# EAGLE board STM32F767VG (EAGLE 9.2.0)
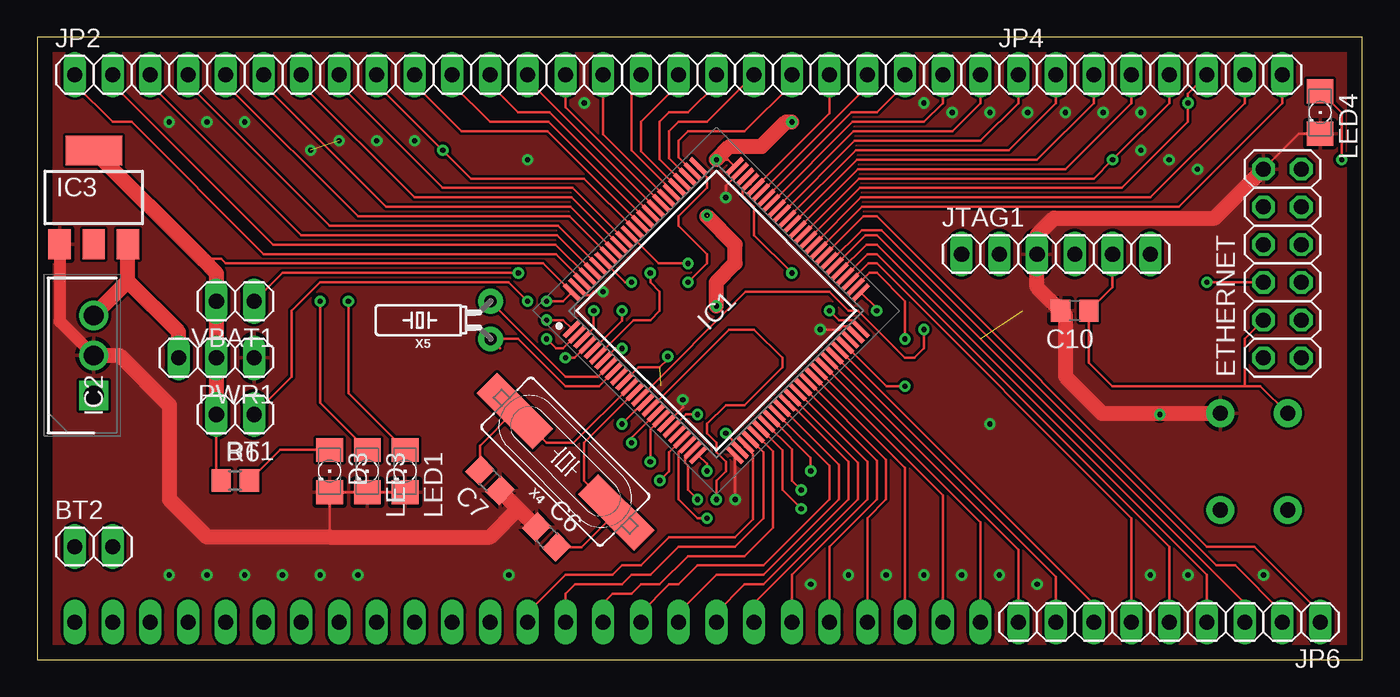
[diagram p0: board, top side]
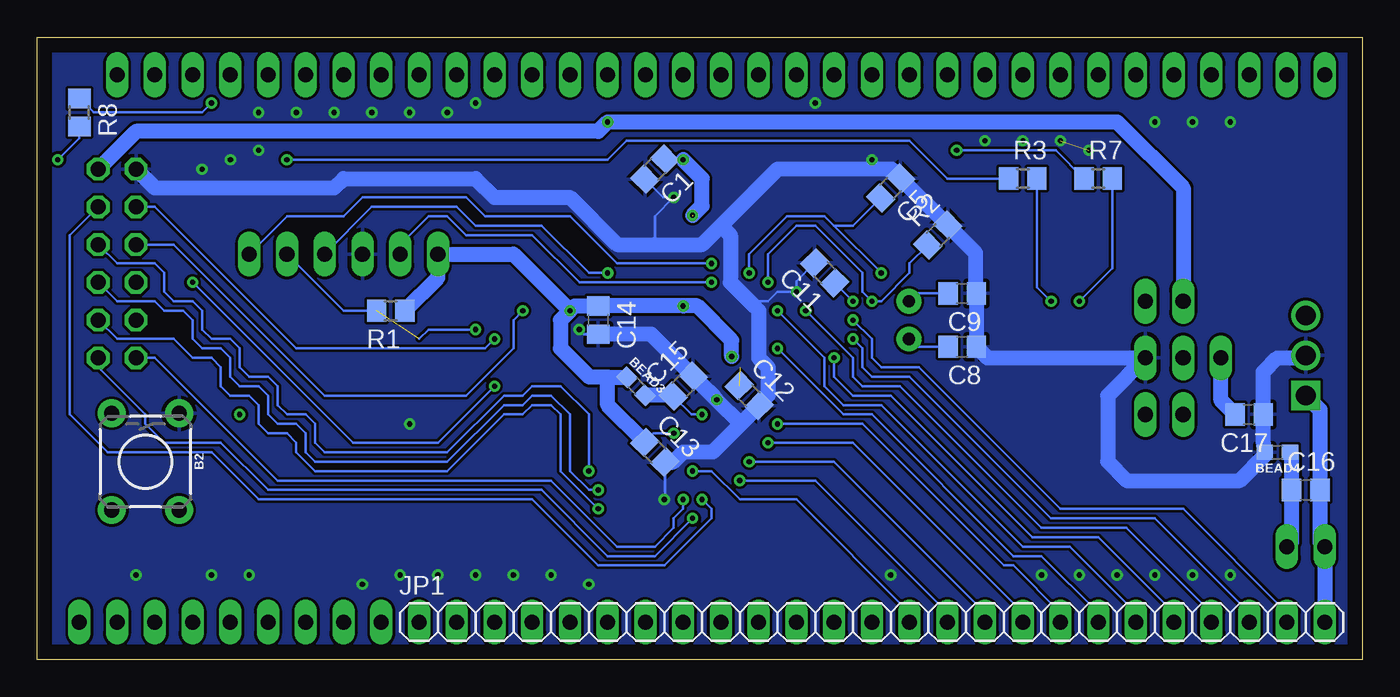
[diagram p1: board, bottom side, seen from below]

Size 89.2 x 41.9 mm. Coordinates in mm from the lower left corner, seen from the top.
Outline: 0,0 89.2,0 89.2,41.9 0,41.9 0,0
Copper layers (1*16): Top 0.035mm / dielectric 1.5mm / Bottom 0.035mm
Design rules "default": minimum track width 6mil, minimum drill 0.35mm, track to track 6mil, track to pad 6mil, pad to pad 6mil, via to via 6mil, smd to smd 6mil, copper to edge 40mil, drill to drill 6mil, minimum pad ring 10mil, minimum via ring 8mil, stop-mask expansion 4mil, vias tented up to drill 0mil, thermal gap 10mil
Net classes: 0 default: width 0.178 mm, drill 0.178 mm, clearance 0.178 mm

## Footprints (pad centres in the part's own frame; a part is rotated, then mirrored left to right if it is on the bottom)
TACTILE_SWITCH_PTH_6.0MM = drill 1.016 pad 1.88: 1 -3.251,2.261; 2 3.251,2.261; 3 -3.251,-2.261; 4 3.251,-2.261
0603 = smd 1.1 x 1: 1 -0.85,0; 2 0.85,0
1X02 = drill 1.016 long: 1 -1.27,0; 2 1.27,0
C0805 = smd 1.3 x 1.5: 1 -0.95,0; 2 0.95,0
LED_1206 = smd 1.6 x 1.803: A -1.422,0; C 1.422,0
2X06 = drill 1.016 octagon: 1 -6.35,-1.27; 2 -6.35,1.27; 3 -3.81,-1.27; 4 -3.81,1.27; 5 -1.27,-1.27; 6 -1.27,1.27; 7 1.27,-1.27; 8 1.27,1.27; 9 3.81,-1.27; 10 3.81,1.27; 11 6.35,-1.27; 12 6.35,1.27
QFP50P1600X1600X160-100N = smd 1.475 x 0.3: 1 -7.738,6; 2 -7.738,5.5; 3 -7.738,5; 4 -7.738,4.5; 5 -7.738,4; 6 -7.738,3.5; 7 -7.738,3; 8 -7.738,2.5; 9 -7.738,2; 10 -7.738,1.5; 11 -7.738,1; 12 -7.738,0.5; 13 -7.738,0; 14 -7.738,-0.5; 15 -7.738,-1; 16 -7.738,-1.5; 17 -7.738,-2; 18 -7.738,-2.5; 19 -7.738,-3; 20 -7.738,-3.5; 21 -7.738,-4; 22 -7.738,-4.5; 23 -7.738,-5; 24 -7.738,-5.5; 25 -7.738,-6; 51 7.738,-6; 52 7.738,-5.5; 53 7.738,-5; 54 7.738,-4.5; 55 7.738,-4; 56 7.738,-3.5; 57 7.738,-3; 58 7.738,-2.5; 59 7.738,-2; 60 7.738,-1.5; 61 7.738,-1; 62 7.738,-0.5; 63 7.738,0; 64 7.738,0.5; 65 7.738,1; 66 7.738,1.5; 67 7.738,2; 68 7.738,2.5; 69 7.738,3; 70 7.738,3.5; 71 7.738,4; 72 7.738,4.5; 73 7.738,5; 74 7.738,5.5; 75 7.738,6 | smd 0.3 x 1.475: 26 -6,-7.738; 27 -5.5,-7.738; 28 -5,-7.738; 29 -4.5,-7.738; 30 -4,-7.738; 31 -3.5,-7.738; 32 -3,-7.738; 33 -2.5,-7.738; 34 -2,-7.738; 35 -1.5,-7.738; 36 -1,-7.738; 37 -0.5,-7.738; 38 0,-7.738; 39 0.5,-7.738; 40 1,-7.738; 41 1.5,-7.738; 42 2,-7.738; 43 2.5,-7.738; 44 3,-7.738; 45 3.5,-7.738; 46 4,-7.738; 47 4.5,-7.738; 48 5,-7.738; 49 5.5,-7.738; 50 6,-7.738; 76 6,7.738; 77 5.5,7.738; 78 5,7.738; 79 4.5,7.738; 80 4,7.738; 81 3.5,7.738; 82 3,7.738; 83 2.5,7.738; 84 2,7.738; 85 1.5,7.738; 86 1,7.738; 87 0.5,7.738; 88 0,7.738; 89 -0.5,7.738; 90 -1,7.738; 91 -1.5,7.738; 92 -2,7.738; 93 -2.5,7.738; 94 -3,7.738; 95 -3.5,7.738; 96 -4,7.738; 97 -4.5,7.738; 98 -5,7.738; 99 -5.5,7.738; 100 -6,7.738
TO270P460X1020X2008-3P = drill 1.32 pad 1.98 square: 1 0,0 | drill 1.32 pad 1.98: 2 2.7,0; 3 5.4,0
SOT223 = smd 1.5 x 2: 1 -2.3,-3.15; 2 0,-3.15; 3 2.3,-3.15 | smd 3.8 x 2: 4 0,3.15
1X25 = drill 1.016 long: 1 -29.21,0; 2 -26.67,0; 3 -24.13,0; 4 -21.59,0; 5 -19.05,0; 6 -16.51,0; 7 -13.97,0; 8 -11.43,0; 9 -8.89,0; 10 -6.35,0; 11 -3.81,0; 12 -1.27,0; 13 1.27,0; 14 3.81,0; 15 6.35,0; 16 8.89,0; 17 11.43,0; 18 13.97,0; 19 16.51,0; 20 19.05,0; 21 21.59,0; 22 24.13,0; 23 26.67,0; 24 29.21,0; 25 31.75,0
1X08 = drill 1.016 long: 1 -8.89,0; 2 -6.35,0; 3 -3.81,0; 4 -1.27,0; 5 1.27,0; 6 3.81,0; 7 6.35,0; 8 8.89,0
1X09 = drill 1.016 long: 1 -10.16,0; 2 -7.62,0; 3 -5.08,0; 4 -2.54,0; 5 0,0; 6 2.54,0; 7 5.08,0; 8 7.62,0; 9 10.16,0
1X06 = drill 1.016 long: 1 -6.35,0; 2 -3.81,0; 3 -1.27,0; 4 1.27,0; 5 3.81,0; 6 6.35,0
1X03 = drill 1.016 long: 1 -2.54,0; 2 0,0; 3 2.54,0
R0805 = smd 1.3 x 1.5: 1 -0.95,0; 2 0.95,0
HC49UP = smd 5.334 x 1.93: 1 -4.826,0; 2 4.826,0
CRYSTAL-PTH-2X6-CYL = drill 0.813 pad 1.676: 1 -1.27,0; 2 1.27,0

## Placement (x,y rotation side)
B2  6MM(momentary)  [TACTILE_SWITCH_PTH_6.0MM]  81.92,13.33 270 bottom
BEAD3  30Ω/1.8A  [0603]  48.9,18.41 315 bottom
BEAD4  30Ω/1.8A  [0603]  5.71,13.97 180 bottom
BT1  [1X02]  13.34,16.51 180 top
BT2  [1X02]  3.81,7.62 0 top
C1  100nF  [C0805]  47.62,33.02 225 bottom
C5  1uF  [C0805]  31.75,31.75 225 bottom
C6  20pF  [C0805]  34.29,8.25 315 top
C7  20pF  [C0805]  30.48,12.06 135 top
C8  4.3pF  [C0805]  26.93,21.06 180 bottom
C9  4.3pF  [C0805]  26.93,24.66 180 bottom
C10  100nF  [C0805]  69.85,23.5 180 top
C11  100nF  [C0805]  36.2,26.04 135 bottom
C12  100nF  [C0805]  41.27,17.78 315 bottom
C13  100nF  [C0805]  47.62,13.97 315 bottom
C14  100nF  [C0805]  51.44,22.86 270 bottom
C15  100nF  [C0805]  45.72,18.41 45 bottom
C16  1uF  [C0805]  3.81,11.43 0 bottom
C17  100nF  [C0805]  7.62,16.51 180 bottom
D3  [LED_1206]  19.68,12.7 270 top
ETHERNET  [2X06]  83.82,26.67 90 top
IC1  STM32F767VGT6  [QFP50P1600X1600X160-100N]  45.72,23.5 45 top
IC2  L7805CV  [TO270P460X1020X2008-3P]  3.81,17.78 90 top
IC3  LD117AS33TR  [SOT223]  3.81,31.11 0 top
JP1  [1X25]  34.29,2.54 0 bottom
JP2  [1X25]  31.75,39.37 0 top
JP4  [1X08]  74.93,39.37 0 top
JP6  [1X09]  76.2,2.54 180 top
JTAG1  [1X06]  68.58,27.3 0 top
LED1  [LED_1206]  24.77,12.7 270 top
LED3  [LED_1206]  22.23,12.7 270 top
LED4  [LED_1206]  86.36,36.83 270 top
PWR1  [1X03]  12.06,20.32 180 top
R1  10k  [R0805]  65.41,23.5 180 bottom
R2  10k  [R0805]  28.57,28.57 45 bottom
R3  100  [R0805]  22.86,32.39 0 bottom
R6  1k  [R0805]  13.34,12.06 0 top
R7  100  [R0805]  17.78,32.39 0 bottom
R8  100  [R0805]  86.36,36.83 270 bottom
VBAT1  [1X02]  13.34,24.13 180 top
X4  8MHz  [HC49UP]  35.56,13.33 135 top
X5  32.768kHz  [CRYSTAL-PTH-2X6-CYL]  30.53,22.86 90 top

## Library data of the parts
B2 = SparkFun-Switches; PROD_ID: SWCH-08441; SF_SKU: COM-00097
BEAD3 BEAD4 = SparkFun-Coils; PROD_ID: NDUC-13805
BT1 BT2 ETHERNET JP1 JP2 JP4 JP6 JTAG1 PWR1 VBAT1 = pinhead
C1 C5-C17 = eagle-ltspice; SPICEMODEL: NONE; SPICEPREFIX: C
D3 LED1 LED3 LED4 = eagle-ltspice; SPICEMODEL: NONE; SPICEPREFIX: D; SPICETYPE: diode
IC1 = STM32F767VGT6; ARROW_PART_NUMBER: STM32F767VGT6; ARROW_PRICE-STOCK: https://www.arrow.com/en/products/stm32f767vgt6/stmicroelectronics; DESCRIPTION: ARM Microcontrollers - MCU 16/32-BITS MICROS; HEIGHT: 1.6mm; MANUFACTURER_NAME: STMicroelectronics; MANUFACTURER_PART_NUMBER: STM32F767VGT6
IC2 = L7805CV; ALLIED_NUMBER: 70013702; ALLIED_PRICE-STOCK: http://www.alliedelec.com/stmicroelectronics-l7805cv/70013702/; DESCRIPTION: Linear voltage regulator,L7805CV 5V 1.5A STMicroelectronics L7805CV, Single Linear Voltage Regulator, 1.5A 5 V, 3-Pin TO-220; HEIGHT: 4.6mm; MANUFACTURER_NAME: STMicroelectronics; MANUFACTURER_PART_NUMBER: L7805CV; MOUSER_PART_NUMBER: 511-L7805CV; MOUSER_PRICE-STOCK: https://www.mouser.com/Search/Refine.aspx?Keyword=511-L7805CV; RS_PART_NUMBER: 8464783; RS_PRICE-STOCK: http://uk.rs-online.com/web/p/products/8464783
IC3 = v-reg
R1-R3 R6-R8 = eagle-ltspice; SPICEMODEL: NONE; SPICEPREFIX: R
X4 = SparkFun-Clocks; PROD_ID: XTAL-11706
X5 = SparkFun-Clocks; PROD_ID: XTAL-10112

## Nets
5V: C17.2 IC2.3 IC3.3 PWR1.3
12V: BT2.1 C16.2 IC2.1 JP1.25
AVDD: BEAD3.2 C15.1 IC1.20
BOOT0: BT1.1 IC1.94 R2.1
CRS_DV: ETHERNET.3 IC1.31
GND: B2.1 BEAD4.2 C1.2 C5.1 C6.1 C7.1 C8.1 C9.1 C10.2 C11.2 C12.2 C13.2 C14.2 C15.2 C17.1 D3.C ETHERNET.12 IC1.10 IC1.19 IC1.26 IC1.49 IC1.74 IC1.99 IC2.2 IC3.1 JTAG1.3 LED1.C LED3.C LED4.C PWR1.1 R2.2
MDC: ETHERNET.2 IC1.16
MDIO: ETHERNET.9 IC1.24
MGND: BEAD4.1 BT2.2 C16.1
N$13: C5.2 IC1.6 VBAT1.1
N$14: C9.2 IC1.8 X5.2
N$15: C8.2 IC1.9 X5.1
N$17: LED1.A R3.2
N$21: C6.2 IC1.13 X4.1
N$22: C7.2 IC1.12 X4.2
N$23: D3.A R6.2
N$26: LED3.A R7.2
N$27: LED4.A R8.2
NINT: ETHERNET.1 IC1.23
NRST: B2.3 C10.1 ETHERNET.4 IC1.14 JTAG1.5 R1.2
PA0: IC1.22 JP1.15
PA3: IC1.25 JP1.14
PA4: IC1.28 JP1.13
PA5: IC1.29 JP1.12
PA6: IC1.30 JP1.11
PA8: IC1.67 JP2.25
PA9: IC1.68 JP2.24
PA10: IC1.69 JP2.23
PA11: IC1.70 JP2.22
PA12: IC1.71 JP2.21
PA15: IC1.77 JP2.20
PB0: IC1.34 JP1.10
PB1: IC1.35 JP1.9
PB2: IC1.36 JP1.8
PB4: IC1.90 JP2.8
PB5: IC1.91 JP2.7
PB6: IC1.92 JP2.6
PB7: IC1.93 JP2.5
PB8: IC1.95 JP2.4
PB9: IC1.96 JP2.3
PB10: IC1.46 JP6.7
PB14: IC1.53 JP6.6
PB15: IC1.54 JP6.5
PC0: IC1.15 JP1.18
PC2: IC1.17 JP1.17
PC3: IC1.18 JP1.16
PC6: IC1.63 JP4.4
PC7: IC1.64 JP4.3
PC8: IC1.65 JP4.2
PC9: IC1.66 JP4.1
PC10: IC1.78 JP2.19
PC11: IC1.79 JP2.18
PC12: IC1.80 JP2.17
PC13: IC1.7 JP1.19
PD0: IC1.81 JP2.16
PD1: IC1.82 JP2.15
PD2: IC1.83 JP2.14
PD3: IC1.84 JP2.13
PD4: IC1.85 JP2.12
PD5: IC1.86 JP2.11
PD6: IC1.87 JP2.10
PD7: IC1.88 JP2.9 R7.1
PD8: IC1.55 JP6.4
PD9: IC1.56 JP6.3
PD10: IC1.57 JP6.2
PD11: IC1.58 JP6.1
PD12: IC1.59 JP4.8
PD13: IC1.60 JP4.7
PD14: IC1.61 JP4.6 R8.1
PD15: IC1.62 JP4.5 R3.1
PE0: IC1.97 JP2.2
PE1: IC1.98 JP2.1
PE2: IC1.1 JP1.24
PE3: IC1.2 JP1.23
PE4: IC1.3 JP1.22
PE5: IC1.4 JP1.21
PE6: IC1.5 JP1.20
PE7: IC1.37 JP1.7
PE8: IC1.38 JP1.6
PE9: IC1.39 JP1.5
PE10: IC1.40 JP1.4
PE11: IC1.41 JP1.3
PE12: IC1.42 JP1.2
PE13: IC1.43 JP1.1
PE14: IC1.44 JP6.9
PE15: IC1.45 JP6.8
RXD0: ETHERNET.5 IC1.32
RXD1: ETHERNET.7 IC1.33
SWO: IC1.89 JTAG1.6
TCK: IC1.76 JTAG1.2
TMS: IC1.72 JTAG1.4
TXD0: ETHERNET.8 IC1.51
TXD1: ETHERNET.10 IC1.52
TXEN: ETHERNET.6 IC1.47
VCAP_1: IC1.48
VCAP_2: IC1.73
VDD: BEAD3.1 BT1.2 C1.1 C11.1 C12.1 C13.1 C14.1 ETHERNET.11 IC1.11 IC1.27 IC1.50 IC1.75 IC1.100 IC3.4 JTAG1.1 PWR1.2 R1.1 R6.1 VBAT1.2
VDDA: IC1.21

## Tracks (layer width: path | path; a pad name or v marks a point on that pad's centre or on a via)
5V
  Top 1.016: 6.11,25.48 IC2.3 | 6.11,25.48 IC3.3 | PWR1.3 9.53,22.07 6.11,25.48
  Bottom 1.016: C17.2 9.53,17.46 PWR1.3
12V
  Bottom 1.016: JP1.25 BT2.1 2.86,7.94 C16.2 2.86,16.83 IC2.1
AVDD  (via drill 0.35)
  Top 0.152: IC1.20 43.69,16.51 v44.45,16.51
  Bottom 0.152: v44.45,16.51 45.16,16.51 C15.1
  Bottom 1.016: C15.1 46.46,17.81 BEAD3.2
BOOT0  (via drill 0.35)
  Top 0.152: IC1.94 39.57,25.4 v40.01,25.4 | v33.02,24.13 31.75,25.4 19.05,25.4 17.14,23.5 17.14,19.05 BT1.1
  Bottom 0.152: v40.01,25.4 40.01,27.3 38.1,29.21 36.83,29.21 33.66,26.04 33.66,24.76 v33.02,24.13 32.38,24.13 30.48,26.04 30.48,26.67 R2.1
CRS_DV  (via drill 0.35)
  Top 0.152: IC1.31 50.16,14.1 50.16,11.43 v51.44,10.16
  Bottom 0.152: ETHERNET.3 83.82,21.59 82.55,21.59 | 82.55,21.59 81.92,21.59 | v51.44,10.16 53.98,12.7 53.98,16.51 54.61,17.14 55.88,17.14 56.52,16.51 57.78,16.51 61.59,12.7 70.48,12.7 71.75,13.97 71.75,14.6 72.39,15.24 73.66,15.24 74.3,15.87 74.3,17.14 74.93,17.78 76.2,17.78 76.83,18.41 76.83,19.68 77.47,20.32 78.74,20.32 80.01,21.59 82.55,21.59
GND  (via drill 0.35)  (1 unrouted)
  Top 0.152: LED4.C 84.94,35.41 ETHERNET.12 | LED1.C LED3.C D3.C 19.68,8.25 | 42.37,16.04 IC1.19 43.46,16.99 v43.46,17.5 | IC1.74 46.35,31.91 v46.35,31.11 | v46.99,10.79 46.99,13.74 IC1.26 | v52.7,22.22 53.99,22.22 54.21,22.44 54.55,22.44 IC1.49 | v38.1,24.76 37.45,24.76 37.23,24.55 36.89,24.55 IC1.99
  Top 0.813: IC3.1 1.51,22.78 IC2.2
  Top 1.016: 32.38,10.16 C6.1 | 32.38,10.16 C7.1 | B2.1 71.68,16.59 69.22,19.05 69.22,23.18 C10.2 67.31,25.08 JTAG1.3 67.31,28.57 68.45,29.72 79.25,29.72 ETHERNET.12 | IC2.2 5.55,20.48 8.89,17.14 8.89,10.79 11.43,8.25 19.68,8.25 30.48,8.25 32.38,10.16
  Bottom 0.152: 48.3,31.79 C1.2 47.06,31.11 v46.35,31.11 47.62,29.84 47.62,27.94 | C13.2 46.95,10.83 v46.99,10.79 | v52.7,22.22 52.39,21.91 C14.2 | C11.2 38.1,25.47 v38.1,24.76 39.37,24.76 40.01,24.13 40.64,24.13 40.96,23.81
  Bottom 1.016: 43.7,17.82 C15.2 | ETHERNET.12 81.28,31.75 69.22,31.75 68.58,32.39 59.69,32.39 58.42,31.11 53.34,31.11 50.16,27.94 47.62,27.94 44.45,27.94 43.18,29.21 | IC2.2 3.97,20.32 5.71,20.32 6.67,19.36 C17.1 6.67,14.71 BEAD4.2 6.57,13.75 8.26,12.06 15.88,12.06 17.14,13.33 17.14,17.78 PWR1.1 25.24,20.32 C8.1 C9.1 26.04,24.71 26.04,27.38 R2.2 C5.1 31.68,33.02 39.37,33.02 43.18,29.21 | 43.18,29.21 42.55,28.57 42.55,25.4 40.96,23.81 40.64,23.5 40.64,20.32 40.01,19.68 40.01,17.78 40.6,17.18 C12.2 41.87,15.84 | C15.2 47.87,21.91 C14.2 | C15.2 v43.46,17.5 41.87,15.91 41.87,15.84 | C13.2 46.39,13.3 45.72,13.97 43.74,13.97 41.87,15.84
  other vias: 82.55,5.71 77.47,5.71 74.93,5.71 64.77,5.71 62.23,5.71 59.69,5.71 57.15,5.71 54.61,5.71 78.11,33.02 76.2,33.66 74.3,34.29 74.3,36.83 71.75,36.83 69.22,36.83 66.67,36.83 64.14,36.83 61.59,36.83 59.69,37.47 36.83,37.47 33.02,33.66 25.4,34.92 22.86,34.92 20.32,34.92 13.97,36.19 11.43,36.19 8.89,36.19 64.14,15.87 67.31,5.08 52.07,5.08 31.75,5.71 21.59,5.71 19.05,5.71 16.51,5.71 13.97,5.71 11.43,5.71 8.89,5.71 18.41,34.29
  pour Top: 0,41.91 88.9,41.91 88.9,0 0,0
  pour Bottom: 0,41.91 88.9,41.91 88.9,0 0,0
MDC  (via drill 0.35)
  Top 0.152: IC1.16 46.57,22.22 48.26,22.22 50.16,20.32 50.16,19.68 47.62,17.14 46.35,17.14 45.09,15.87 45.09,15.24 45.72,14.6 45.72,13.97 46.35,13.33 46.35,12.7 45.72,12.06 v45.72,10.79
  Bottom 0.152: ETHERNET.2 81.28,20.32 73.03,12.06 54.61,12.06 50.16,7.62 47.62,7.62 46.35,8.89 46.35,9.52 45.72,10.16 v45.72,10.79
MDIO  (via drill 0.35)
  Top 0.152: IC1.24 43.61,13.61 43.61,13.26 43.81,13.05 43.81,11.43 v44.45,10.79
  Bottom 0.152: ETHERNET.9 87,28.57 87,16.51 84.45,13.97 77.47,13.97 74.3,10.79 55.88,10.79 51.44,6.35 46.99,6.35 43.81,9.52 43.81,10.16 v44.45,10.79
MGND
  Bottom 1.016: BT2.2 4.76,7.94 C16.1 4.76,13.86 BEAD4.1
N$5  (via drill 0.35)
  other vias: 75.56,16.51
N$13  (via drill 0.35)
  Top 0.152: IC1.6 40.13,22.86 41.27,22.86 41.91,23.5 41.91,24.76 41.27,25.4 v41.27,26.04 | VBAT1.1 16.51,26.04 v32.38,26.04
  Bottom 0.152: v41.27,26.04 41.27,27.3 38.73,29.84 36.2,29.84 35.56,29.21 | 35.56,29.21 v32.38,26.04 | C5.2 34.29,29.21 35.56,29.21
N$14
  Top 0.152: IC1.8 37.74,19.05 35.56,19.05 30.52,24.08 X5.2
  Bottom 0.152: C9.2 30,24.66 X5.2
N$15
  Top 0.152: 31.16,20.96 X5.1 32.38,21.59 35.56,18.41 37.81,18.41 IC1.9
  Bottom 0.152: C8.2 30,21.06 X5.1
N$17  (via drill 0.35)
  Top 0.152: v20.95,24.13 20.95,17.93 LED1.A
  Bottom 0.152: R3.2 21.91,25.08 v20.95,24.13
N$21
  Top 0.152: C6.2 36.63,7.58 38.66,9.6 | 38.66,9.6 X4.1 | IC1.13 36.83,14.6 36.83,12.06 38.66,10.24 38.66,9.6
N$22
  Top 0.152: C7.2 29.81,14.41 X4.2 | IC1.12 36.12,14.6 34.29,14.6 X4.2 | X4.2
N$23
  Top 0.152: R6.2 16.34,14.12 D3.A
N$26  (via drill 0.35)
  Top 0.152: v19.05,24.13 19.05,17.3 LED3.A
  Bottom 0.152: R7.2 16.83,26.35 v19.05,24.13
N$27  (via drill 0.35)
  Top 0.152: v87.81,33.66 87.81,36.8 LED4.A
  Bottom 0.152: R8.2 86.36,35.11 v87.81,33.66
NINT  (via drill 0.35)
  Top 0.152: IC1.23 43.7,14.49 43.18,13.97 43.18,10.79 44.45,9.52 v45.09,9.52
  Bottom 0.152: v45.09,9.52 47.62,6.98 50.8,6.98 55.24,11.43 73.66,11.43 76.83,14.6 80.64,14.6 81.92,15.87 81.92,16.51 85.09,19.68 ETHERNET.1
NRST  (via drill 0.35)  (1 unrouted)
  Top 0.152: B2.3 82.35,18.41 81.28,18.41 | 81.28,18.41 72.39,18.41 70.8,20 C10.1 72.39,25.08 JTAG1.5 | ETHERNET.4 81.28,21.59 81.28,18.41 | v59.69,22.22 59.69,20.96 59.05,20.32 58.42,20.32 55.24,23.5 54.61,23.5 53.34,24.76 47.7,24.76 IC1.14
  Bottom 0.152: R1.2 68.58,23.5 JTAG1.5 | v59.69,22.22 62.87,22.22 63.5,21.59
PA0  (via drill 0.35)
  Top 0.152: 43.42,14.84 IC1.22 42.55,13.96 42.55,12.7 v41.91,12.06
  Bottom 0.152: JP1.15 27.94,3.17 36.83,12.06 v41.91,12.06
PA3  (via drill 0.35)
  Top 0.152: IC1.25 45.09,13.19 v45.09,12.7
  Bottom 0.152: v45.09,12.7 43.81,12.7 41.91,10.79 38.1,10.79 30.48,3.17 JP1.14
PA4
  Top 0.152: IC1.28 47.66,14.35 48.18,13.82 48.18,9.45 46.99,8.25 42.55,8.25 40.64,6.35 39.37,6.35 38.73,5.71 35.56,5.71 33.02,3.17 JP1.13
PA5
  Top 0.152: IC1.29 48.02,14.84 48.9,13.97 48.9,9.52 46.99,7.62 43.18,7.62 41.27,5.71 40.01,5.71 39.37,5.08 36.2,5.08 35.56,4.44 JP1.12
PA6
  Top 0.152: IC1.30 49.53,14.03 49.53,8.89 47.62,6.98 43.81,6.98 41.91,5.08 40.64,5.08 40.01,4.44 38.73,4.44 38.1,3.81 JP1.11
PA8
  Top 0.152: JP2.25 63.5,37.47 61.59,35.56 54.96,35.56 IC1.67
PA9
  Top 0.152: JP2.24 60.96,37.47 59.69,36.19 54.88,36.19 IC1.68
PA10
  Top 0.152: IC1.69 54.81,36.83 56.52,36.83 58.42,38.73 JP2.23
PA11
  Top 0.152: 55.88,38.73 JP2.22 | 55.88,38.73 55.88,38.61 | IC1.70 55.88,38.61 | 55.88,38.61 55.88,38.73
PA12
  Top 0.152: JP2.21 53.34,36.77 IC1.71
PA15
  Top 0.152: IC1.77 43.18,33.81 43.18,34.92 43.81,35.56 47.62,35.56 50.8,38.73 JP2.20
PB0
  Top 0.152: IC1.34 53.34,13.05 53.34,10.79 48.9,6.35 44.45,6.35 43.18,5.08 42.55,5.08 40.64,3.17 JP1.10
PB1
  Top 0.152: IC1.35 53.98,13.12 53.98,10.79 48.9,5.71 45.72,5.71 43.18,3.17 JP1.9
PB2
  Top 0.152: JP1.8 45.72,3.17 47.62,5.08 48.9,5.08 54.61,10.79 54.61,13.33 51.16,16.79 51.15,16.79 50.62,17.32 IC1.36
PB4
  Top 0.152: IC1.90 36.05,31.75 27.3,31.75 20.32,38.73 JP2.8
PB5
  Top 0.152: IC1.91 35.98,31.11 25.4,31.11 17.78,38.73 JP2.7
PB6
  Top 0.152: IC1.92 35.91,30.48 23.5,30.48 15.24,38.73 JP2.6
PB7
  Top 0.152: IC1.93 35.83,29.84 21.59,29.84 12.7,38.73 JP2.5
PB8
  Top 0.152: IC1.95 35.05,29.21 19.68,29.21 10.16,38.73 JP2.4
PB9
  Top 0.152: IC1.96 34.98,28.57 17.78,28.57 7.62,38.73 JP2.3
PB10
  Top 0.152: IC1.46 71.12,3.75 JP6.7
PB14
  Top 0.152: IC1.53 55.97,26.67 56.52,26.67 73.66,9.52 JP6.6
PB15
  Top 0.152: IC1.54 55.89,27.3 56.52,27.3 76.2,7.62 JP6.5
PC0  (via drill 0.35)
  Top 0.152: IC1.15 40.82,17.32 40.29,16.79 40.28,16.79 v39.37,15.87
  Bottom 0.152: v39.37,15.87 33.66,15.87 24.13,6.35 23.5,6.35 20.32,3.17 JP1.18
PC2  (via drill 0.35)
  Top 0.152: IC1.17 40.01,14.95 v40.01,14.6
  Bottom 0.152: JP1.17 22.86,3.17 34.29,14.6 v40.01,14.6
PC3  (via drill 0.35)
  Top 0.152: IC1.18 41.27,15.51 v41.27,13.33
  Bottom 0.152: JP1.16 25.4,3.17 35.56,13.33 v41.27,13.33
PC6
  Top 0.152: JP4.4 73.66,37.47 69.22,33.02 55.88,33.02 | 55.88,33.02 55.24,33.02 | IC1.63 55.24,33.02 | 55.24,33.02 55.88,33.02
PC7
  Top 0.152: JP4.3 71.12,37.47 67.31,33.66 55.17,33.66 IC1.64
PC8
  Top 0.152: JP4.2 68.58,37.47 65.41,34.29 55.1,34.29 IC1.65
PC9
  Top 0.152: JP4.1 66.04,37.47 63.5,34.92 55.88,34.92 | 55.88,34.92 55.24,34.92 | IC1.66 55.03,34.92 55.88,34.92
PC10
  Top 0.152: IC1.78 42.55,33.74 42.55,35.56 43.18,36.19 45.09,36.19 JP2.19
PC11
  Top 0.152: JP2.18 45.72,38.73 43.81,36.83 42.55,36.83 41.91,36.19 41.91,33.67 IC1.79
PC12
  Top 0.152: IC1.80 40.64,34.23 40.64,36.19 43.18,38.73 JP2.17
PC13  (via drill 0.35)
  Top 0.152: IC1.7 38.94,20.96 v39.37,20.96
  Bottom 0.152: v39.37,20.96 34.92,16.51 33.02,16.51 23.5,6.98 21.59,6.98 17.78,3.17 JP1.19
PD0
  Top 0.152: JP2.16 40.01,38.73 40.01,34.29 42.72,31.57 IC1.81
PD1
  Top 0.152: JP2.15 38.1,35.36 IC1.82
PD2
  Top 0.152: JP2.14 35.56,37.19 IC1.83
PD3
  Top 0.152: JP2.13 33.02,39.02 IC1.84
PD4
  Top 0.152: IC1.85 34.51,36.83 32.38,36.83 30.48,38.73 JP2.12
PD5
  Top 0.152: IC1.86 34.43,36.19 30.48,36.19 27.94,38.73 JP2.11
PD6
  Top 0.152: IC1.87 34.36,35.56 28.57,35.56 25.4,38.73 JP2.10
PD7  (via drill 0.35)
  Top 0.152: IC1.88 36.83,32.39 29.21,32.39 v27.3,34.29 22.86,38.73 | 22.86,38.73 JP2.9 22.86,38.73
  Bottom 0.152: v27.3,34.29 20.64,34.29 R7.1
PD8
  Top 0.152: IC1.55 55.82,27.94 56.52,27.94 78.74,5.71 JP6.4
PD9
  Top 0.152: IC1.56 55.75,28.57 56.52,28.57 81.28,3.81 JP6.3
PD10
  Top 0.152: IC1.57 53.45,26.84 55.51,28.9 56.82,28.9 79.38,6.35 80.64,6.35 83.82,3.17 JP6.2
PD11
  Top 0.152: IC1.58 55.61,29.84 56.52,29.84 78.74,7.62 81.92,7.62 86.36,3.17 JP6.1
PD12
  Top 0.152: JP4.8 83.82,37.47 76.83,30.48 55.53,30.48 IC1.59
PD13
  Top 0.152: IC1.60 55.46,31.11 74.93,31.11 81.28,37.47 JP4.7
PD14  (via drill 0.35)
  Top 0.152: IC1.61 55.39,31.75 73.03,31.75 77.47,36.19 v77.47,37.47 77.47,38.1 JP4.6
  Bottom 0.152: R8.1 85.41,36.83 78.11,36.83 v77.47,37.47
PD15  (via drill 0.35)
  Top 0.152: IC1.62 55.32,32.39 71.12,32.39 v72.39,33.66 76.2,37.47 JP4.5
  Bottom 0.152: v72.39,33.66 50.8,33.66 49.53,34.92 30.48,34.92 27.94,32.39 R3.1
PE0
  Top 0.152: IC1.97 34.91,27.94 15.88,27.94 5.08,38.73 JP2.2
PE1
  Top 0.152: IC1.98 36.71,25.52 34.92,27.3 15.24,27.3 6.35,36.19 5.08,36.19 2.54,38.73 JP2.1
PE2  (via drill 0.35)
  Top 0.152: IC1.1 35.41,22.86 v34.29,22.86
  Bottom 0.152: v34.29,22.86 33.02,21.59 33.02,20.32 32.38,19.68 29.84,19.68 20.32,10.16 12.06,10.16 5.08,3.17 JP1.24
PE3  (via drill 0.35)
  Top 0.152: IC1.2 35.4,20.96 34.92,20.96 v34.29,21.59
  Bottom 0.152: v34.29,21.59 33.66,20.96 33.66,19.68 33.02,19.05 30.48,19.05 20.95,9.52 13.97,9.52 7.62,3.17 JP1.23
PE4  (via drill 0.35)
  Top 0.152: IC1.3 37.47,22.31 v37.47,23.5
  Bottom 0.152: v37.47,23.5 34.29,20.32 34.29,19.05 33.66,18.41 31.11,18.41 21.59,8.89 15.88,8.89 10.16,3.17 JP1.22
PE5  (via drill 0.35)
  Top 0.152: IC1.4 36.18,20.32 v35.56,20.32
  Bottom 0.152: v35.56,20.32 35.56,19.05 34.29,17.78 31.75,17.78 22.23,8.25 17.78,8.25 12.7,3.17 JP1.21
PE6  (via drill 0.35)
  Top 0.152: IC1.5 39.37,22.8 v39.37,23.5
  Bottom 0.152: v39.37,23.5 36.2,20.32 36.2,18.41 34.92,17.14 32.38,17.14 22.86,7.62 19.68,7.62 15.24,3.17 JP1.20
PE7
  Top 0.152: IC1.37 55.24,13.26 55.24,10.79 48.26,3.81 JP1.7
PE8
  Top 0.152: IC1.38 55.88,13.33 55.88,10.79 50.8,5.71 JP1.6
PE9
  Top 0.152: IC1.39 56.52,13.41 56.52,10.79 53.34,7.62 JP1.5
PE10
  Top 0.152: IC1.40 57.15,13.48 57.15,10.79 55.88,9.52 JP1.4
PE11
  Top 0.152: IC1.41 58.42,12.92 JP1.3
PE12
  Top 0.152: IC1.42 60.96,11.08 JP1.2
PE13
  Top 0.152: IC1.43 63.5,9.25 JP1.1
PE14
  Top 0.152: IC1.44 66.04,7.42 JP6.9
PE15
  Top 0.152: IC1.45 68.58,5.58 JP6.8
RXD0  (via drill 0.35)
  Top 0.152: IC1.32 50.8,14.17 50.8,12.06 v51.44,11.43
  Bottom 0.152: ETHERNET.5 83.82,24.13 81.28,24.13 80.64,23.5 79.38,23.5 78.74,22.86 78.74,21.59 78.11,20.96 76.83,20.96 76.2,20.32 76.2,19.05 75.56,18.41 74.3,18.41 73.66,17.78 73.66,16.51 73.03,15.87 71.75,15.87 71.12,15.24 71.12,13.97 70.48,13.33 61.59,13.33 57.78,17.14 56.52,17.14 55.88,17.78 54.61,17.78 53.34,16.51 53.34,12.7 52.07,11.43 v51.44,11.43
RXD1  (via drill 0.35)
  Top 0.152: IC1.33 52.07,13.61 v52.07,12.7
  Bottom 0.152: ETHERNET.7 83.82,26.67 81.28,26.67 80.64,26.04 80.64,24.76 80.01,24.13 78.74,24.13 78.11,23.5 78.11,22.22 77.47,21.59 76.2,21.59 75.56,20.96 75.56,19.68 74.93,19.05 73.66,19.05 73.03,18.41 73.03,17.14 72.39,16.51 71.12,16.51 70.48,15.87 70.48,14.6 69.85,13.97 61.59,13.97 57.78,17.78 56.52,17.78 55.88,18.41 53.98,18.41 52.07,16.51 v52.07,12.7
SWO  (via drill 0.35)
  Top 0.152: IC1.89 41.84,26.67 v43.81,26.67
  Bottom 0.152: JTAG1.6 72.39,29.84 68.58,29.84 67.31,31.11 60.33,31.11 59.05,29.84 53.34,29.84 50.16,26.67 v43.81,26.67
TCK  (via drill 0.35)
  Top 0.152: IC1.76 44.49,33.07 45.09,32.48 45.09,31.75 43.18,29.84 43.18,29.21 45.09,27.3 45.09,26.67 v43.81,25.4
  Bottom 0.152: JTAG1.2 64.77,27.94 62.87,29.84 61.59,29.84 60.33,28.57 55.88,28.57 52.7,25.4 v43.81,25.4
TMS  (via drill 0.35)
  Top 0.152: 48.01,32.01 IC1.72 47.48,31.62 47.48,31.27 47.62,31.13 | 47.62,31.13 47.62,31.11 | 47.62,31.13 48.26,30.5 48.26,28.57 v50.8,26.04
  Bottom 0.152: JTAG1.4 66.67,30.48 60.96,30.48 59.69,29.21 55.24,29.21 52.07,26.04 v50.8,26.04
TXD0  (via drill 0.35)
  Top 0.152: v56.52,23.5 56.52,23.64 IC1.51
  Bottom 0.152: ETHERNET.8 80.01,27.94 69.85,17.78 60.33,17.78 57.15,20.96 57.15,22.86 v56.52,23.5
TXD1  (via drill 0.35)
  Top 0.152: IC1.52 56.04,26.04 56.52,26.04 58.42,24.13 v58.42,21.59
  Bottom 0.152: ETHERNET.10 81.28,30.48 71.75,20.96 59.05,20.96 v58.42,21.59
TXEN  (via drill 0.35)
  Top 0.152: ETHERNET.6 v78.74,25.4 | IC1.47 57.16,18.41 v58.42,18.41
  Bottom 0.152: v78.74,25.4 67.94,14.6 62.23,14.6 v58.42,18.41
VDD  (via drill 0.35)  (2 unrouted)
  Top 0.152: IC1.27 47.3,14.27 46.77,14.8 46.77,14.82 v46.35,15.24 | BT1.2 12.06,12.38 R6.1 | 11.1,26.97 12.39,26.97 12.7,26.67 34.06,26.67 IC1.100 35.41,24.13 v34.29,24.13 | IC1.50 54.84,22.86 53.98,22.86 v53.34,23.5 | v42.45,20.41 42.45,20.23 41.91,19.68 40.5,19.68 IC1.11 | v45.72,33.66 46.5,33.66 IC1.75
  Top 1.016: IC3.4 11.1,26.97 12.06,26.01 VBAT1.2 PWR1.2 BT1.2 | v45.72,23.81 45.72,25.4 46.99,26.67 46.99,27.94 45.09,29.84 | v45.72,33.66 46.61,34.54 48.77,34.54 50.42,36.19 v50.8,36.19
  Bottom 0.152: v46.35,15.24 47.7,15.24 C13.1 | v34.29,24.13 C11.1 | C11.1 | 42.45,20.23 v42.45,20.41 | C1.1 45.76,33.69 v45.72,33.66
  Bottom 1.016: 50.8,19.02 BEAD3.1 | 50.8,19.02 52.04,19.02 53.98,20.96 53.98,22.86 v53.34,23.5 | R1.1 62.23,25.72 JTAG1.1 57.15,27.3 v53.34,23.5 | ETHERNET.11 82.55,35.56 51.44,35.56 v50.8,36.19 16.51,36.19 12.06,31.75 VBAT1.2 | C13.1 50.8,17.14 50.8,19.02 | v53.34,23.5 | v42.45,20.41 42.45,21.5 44.77,23.81 v45.72,23.81 C14.1 53.02,23.81 v53.34,23.5 | v45.09,29.91 44.45,30.54 44.45,32.39 v45.72,33.66